# Altium PCB Core.PcbDoc
Units mm, origin at the board's own origin, x right, y up, seen from the top; angles counter-clockwise.
Board outline 280.42 x 192.91 mm, 2 copper layers (Top Layer, Bottom Layer); 1 components, 3 nets, 82 pads, 0 vias.
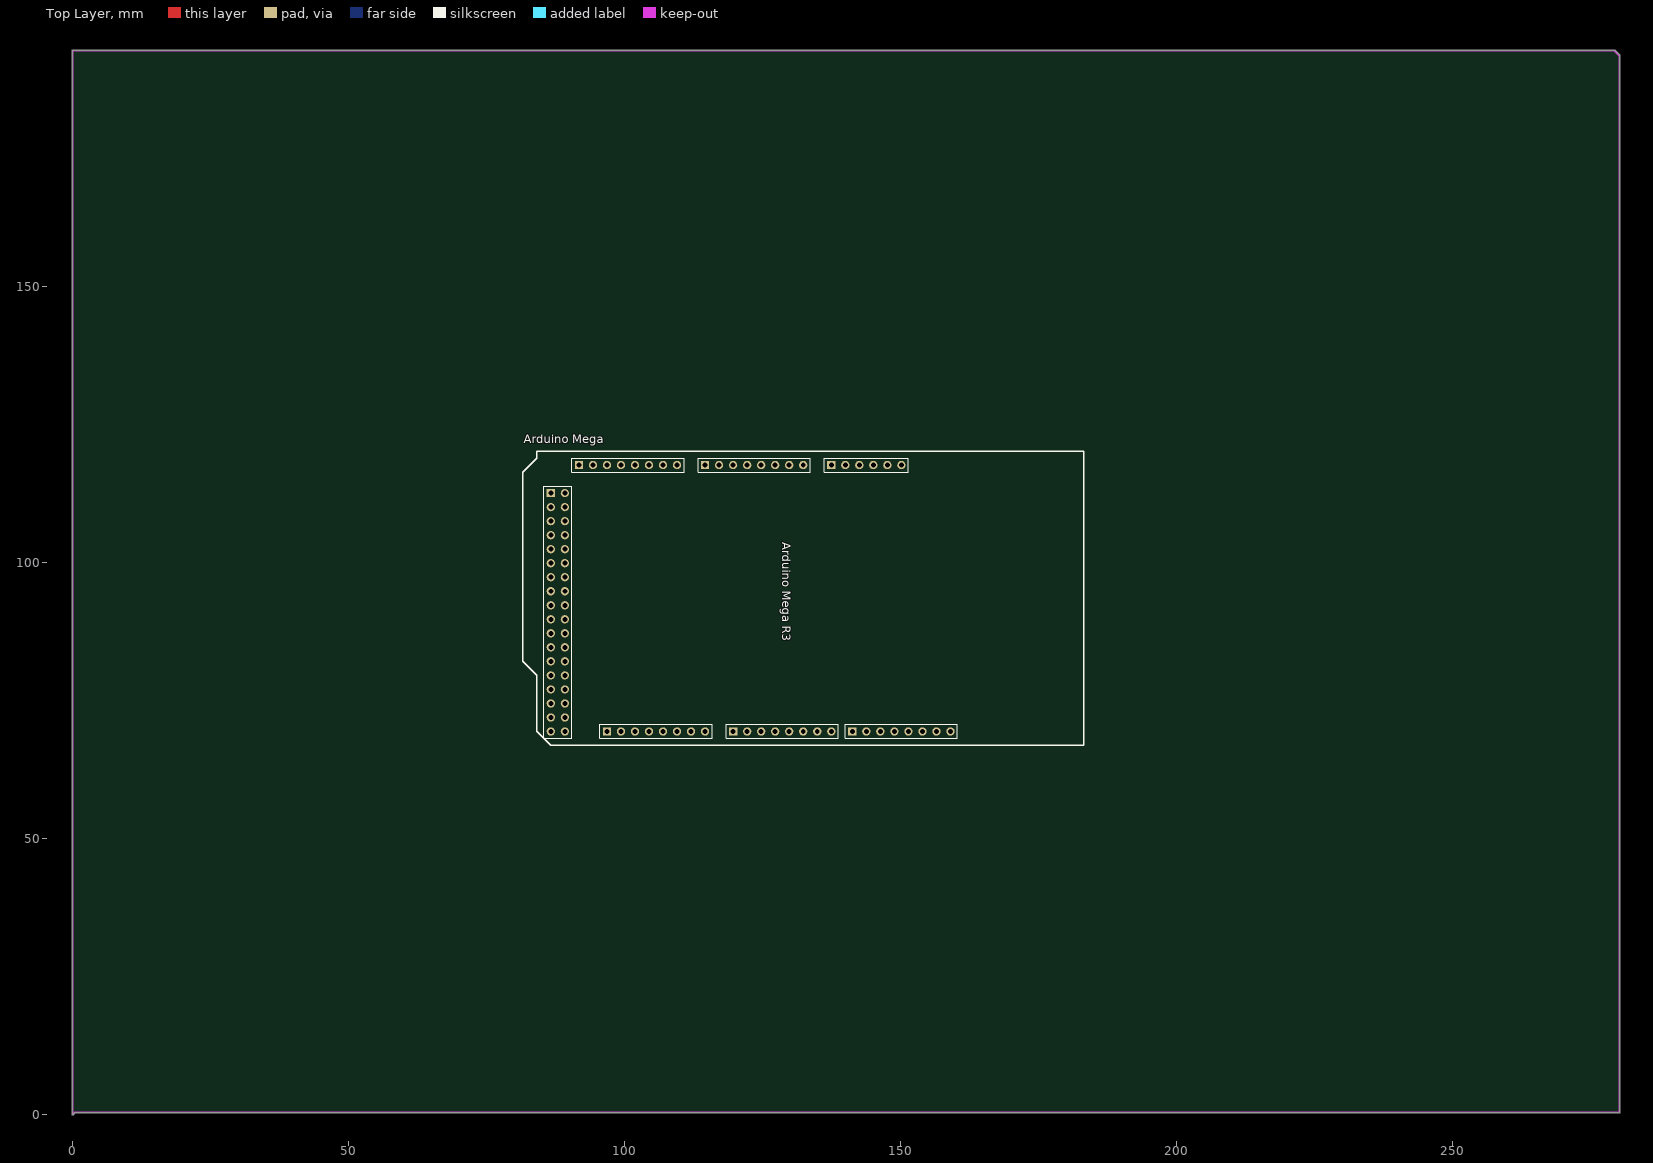
[diagram p0: Top Layer view]
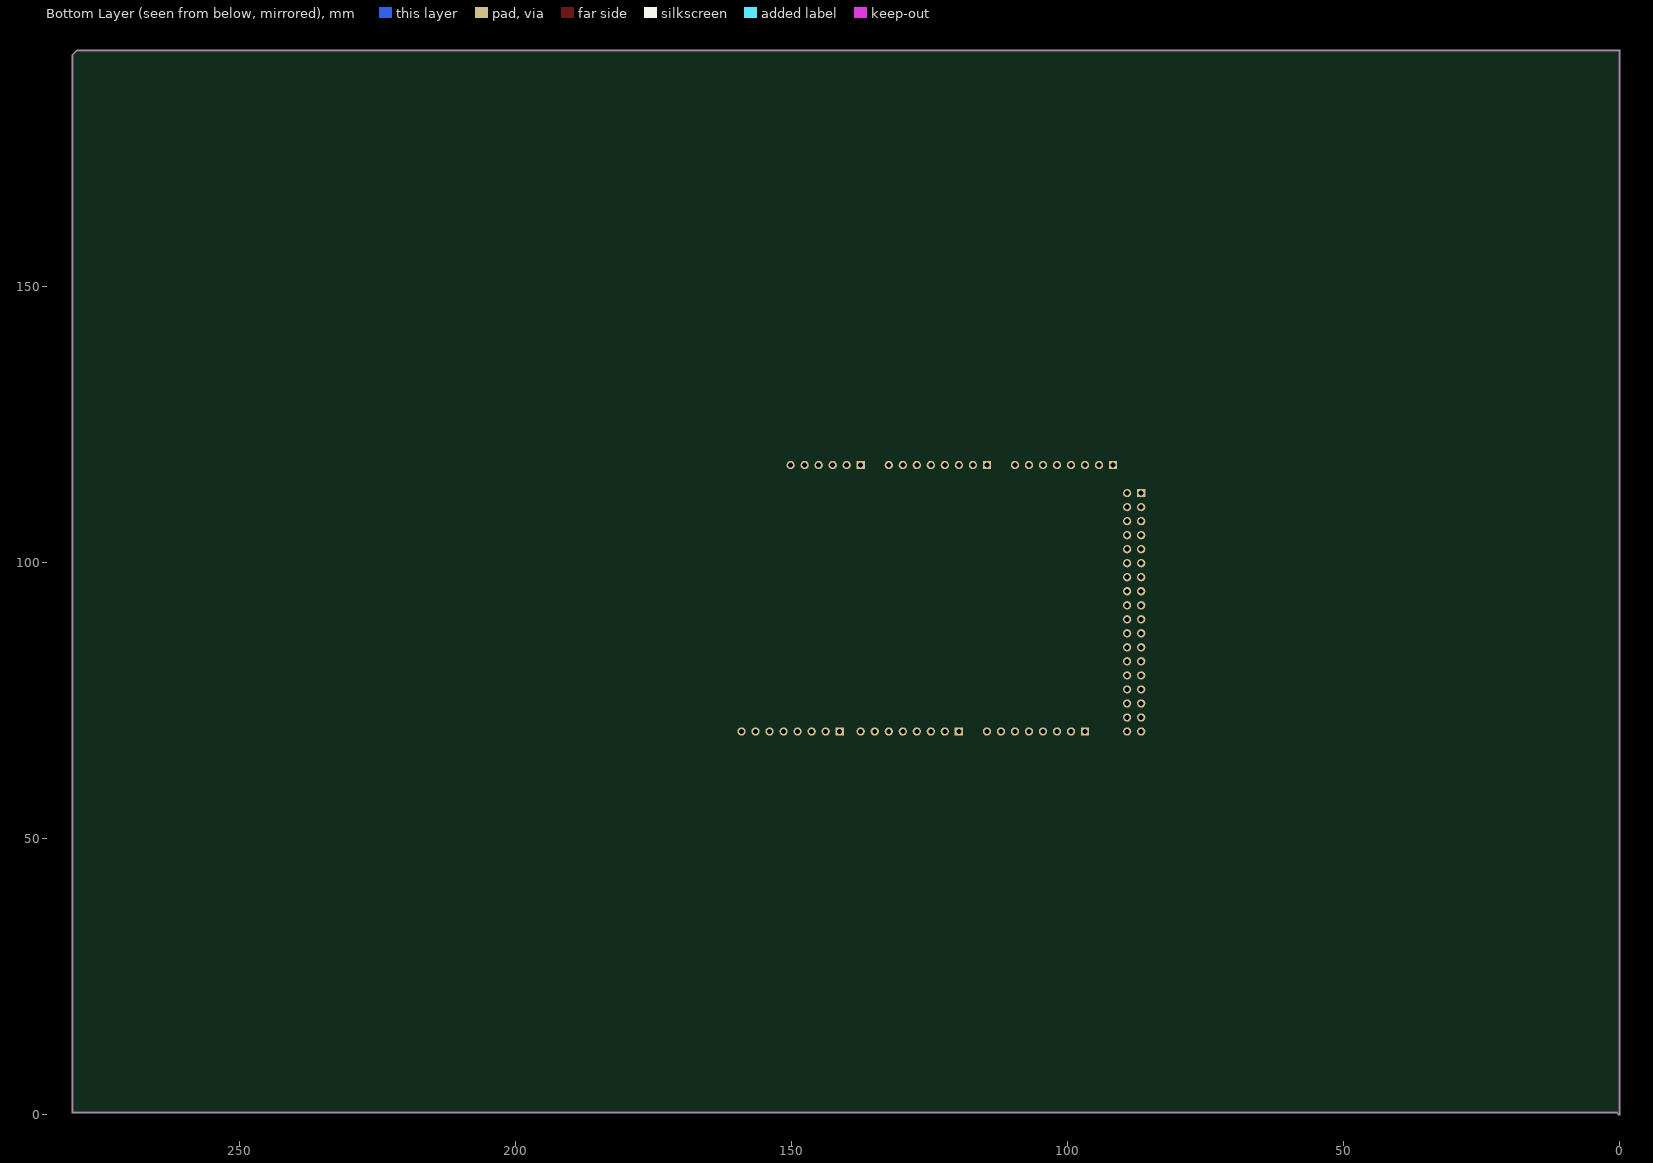
[diagram p1: Bottom Layer view, seen from below]

## Layer stack, top to bottom
Top Solder: solder mask 0.0102, Solder Resist, Dk 3.5
Top Layer: signal copper 0.0356
Dielectric 1: dielectric 0.32, FR-4, Dk 4.8
Bottom Layer: signal copper 0.0356
Bottom Solder: solder mask 0.0102, Solder Resist, Dk 3.5

## Board outline
-0.127,0 -0.127,192.532 cw(c0,192.532) -0.11,192.595 cw(c0,192.659) 0,192.786 279.273,192.786 cw(c279.273,192.659) 279.364,192.749 279.363,192.749 280.252,191.86 280.252,191.861 cw(c280.162,191.77) 280.289,191.77 280.289,0.381 cw(c280.162,0.381) 280.162,0.254 0.434,0.254 0.09,-0.09 0.091,-0.09 cw(c0,0)

## Design rules (kind name [scope] priority, off if disabled: settings)
Clearance [All] p1: gap=0.254 ignorepadtopadclearanceinfootprint=FALSE except(0: Arc-Hole Track-Hole SMDPad-Hole THPad-Hole Via-Hole Fill-Hole Poly-Hole Region-Hole Text-Hole)
PolygonConnect [All] p1: connectstyle=Relief reliefconductorwidth=0.254 reliefentries=4 polygonreliefangle="90 Angle" airgapwidth=0.254
RoutingVias [All] p1: holewidth=0.711 width=1.27 viastyle="Through Hole" minholewidth=0.711 minwidth=1.27 maxholewidth=0.711 maxwidth=1.27
SolderMaskExpansion [All] p1: expansion=0.102
Width [All] p1: maxlimit=0.254 minlimit=0.254 preferedwidth=0.254
30 further rules are at their usual default settings.

## Components (designator, comment, footprint, x,y, rotation, side; value= is the part's Value field where it differs from the comment)
"Arduino Mega" "ARDUINO MEGA" "ARDUINO MEGA" 129.794,92.202 r180 top

## Footprints (in the part's own frame and the unit in brackets; to place one, negate y for a bottom-side part, rotate by r counter-clockwise, add the part's x,y. Pads: shape width x height; smd on the part's side, far side on the other; paste and mask are expansions set on the pad)
"ARDUINO MEGA" [mm] "Arduino Mega 2560"
  rect 1.5x1.5 hole 0.9: 0(10.16,22.86) 8(-11.43,22.86) 21(33.02,22.86) 59(-7.62,-25.4) 67(15.24,-25.4) 75(38.1,-25.4) 79(43.18,-20.32)
  round 1.5 hole 0.9: 1(7.62,22.86) 2(5.08,22.86) 3(2.54,22.86) 4(0,22.86) 5(-2.54,22.86) 6(-5.08,22.86) 7(-7.62,22.86) 9(-13.97,22.86) 10(-16.51,22.86) 11(-19.05,22.86) 12(-21.59,22.86) 13(-24.13,22.86) 14(15.24,22.86) 15(17.78,22.86) 16(20.32,22.86) 17(22.86,22.86) 18(25.4,22.86) 19(27.94,22.86) 20(30.48,22.86) 22(40.64,20.32) 23(43.18,20.32) 24(40.64,17.78) 25(43.18,17.78) 26(40.64,15.24) 27(43.18,15.24) 28(40.64,12.7) 29(43.18,12.7) 30(40.64,10.16) 31(43.18,10.16) 32(40.64,7.62) 33(43.18,7.62) 34(40.64,5.08) 35(43.18,5.08) 36(40.64,2.54) 37(43.18,2.54) 38(40.64,0) 39(43.18,0) 40(40.64,-2.54) 41(43.18,-2.54) 42(40.64,-5.08) 43(43.18,-5.08) 44(40.64,-7.62) 45(43.18,-7.62) 46(40.64,-10.16) 47(43.18,-10.16) 48(40.64,-12.7) 49(43.18,-12.7) 50(40.64,-15.24) 51(43.18,-15.24) 52(40.64,-17.78) 53(43.18,-17.78) 54(-20.32,-25.4) 55(-17.78,-25.4) 56(-15.24,-25.4) 57(-12.7,-25.4) 58(-10.16,-25.4) 60(-2.54,-25.4) 61(0,-25.4) 62(2.54,-25.4) 63(5.08,-25.4) 64(7.62,-25.4) 65(10.16,-25.4) 66(12.7,-25.4) 68(20.32,-25.4) 69(22.86,-25.4) 70(25.4,-25.4) 71(27.94,-25.4) 72(30.48,-25.4) 73(33.02,-25.4) 74(35.56,-25.4) 76(-26.67,22.86) 77(-29.21,22.86) 78(40.64,-20.32) 80(43.18,22.86) 81(40.64,22.86)
  silkscreen extent -53.34,-27.94 48.26,25.4

## Nets (pads, with @x,y where several pads share a name; then routed paths per layer and width w, separated by ;. In a path a pad name is that pad's centre, name@x,y a point inside that pad or via, vN(x,y) a via of type N, cw(c..) or ccw(c..) an arc to the next point about the centre after c; other vN are vias at no path point)
3.3V: 
DHT_Signal: "Arduino Mega.53"
GND: 
pads on no net: "Arduino Mega.0" "Arduino Mega.1" "Arduino Mega.2" "Arduino Mega.3" "Arduino Mega.4" "Arduino Mega.5" "Arduino Mega.6" "Arduino Mega.7" "Arduino Mega.8" "Arduino Mega.9" "Arduino Mega.10" "Arduino Mega.11" "Arduino Mega.12" "Arduino Mega.13" "Arduino Mega.14" "Arduino Mega.15" "Arduino Mega.16" "Arduino Mega.17" "Arduino Mega.18" "Arduino Mega.19" "Arduino Mega.20" "Arduino Mega.21" "Arduino Mega.22" "Arduino Mega.23" "Arduino Mega.24" "Arduino Mega.25" "Arduino Mega.26" "Arduino Mega.27" "Arduino Mega.28" "Arduino Mega.29" "Arduino Mega.30" "Arduino Mega.31" "Arduino Mega.32" "Arduino Mega.33" "Arduino Mega.34" "Arduino Mega.35" "Arduino Mega.36" "Arduino Mega.37" "Arduino Mega.38" "Arduino Mega.39" "Arduino Mega.40" "Arduino Mega.41" "Arduino Mega.42" "Arduino Mega.43" "Arduino Mega.44" "Arduino Mega.45" "Arduino Mega.46" "Arduino Mega.47" "Arduino Mega.48" "Arduino Mega.49" "Arduino Mega.50" "Arduino Mega.51" "Arduino Mega.52" "Arduino Mega.54" "Arduino Mega.55" "Arduino Mega.56" "Arduino Mega.57" "Arduino Mega.58" "Arduino Mega.59" "Arduino Mega.60" "Arduino Mega.61" "Arduino Mega.62" "Arduino Mega.63" "Arduino Mega.64" "Arduino Mega.65" "Arduino Mega.66" "Arduino Mega.67" "Arduino Mega.68" "Arduino Mega.69" "Arduino Mega.70" "Arduino Mega.71" "Arduino Mega.72" "Arduino Mega.73" "Arduino Mega.74" "Arduino Mega.75" "Arduino Mega.76" "Arduino Mega.77" "Arduino Mega.78" "Arduino Mega.79" "Arduino Mega.80" "Arduino Mega.81"

## Keep-outs
Top Layer:
  lines w0.254: 0,0 0.381,0.381 ; 279.273,192.659 280.162,191.77
Keep-Out Layer:
  lines w0.254: 0,0 0,192.532 ; 0,192.659 279.273,192.659 ; 0.381,0.381 280.162,0.381 280.162,191.77

## Text inside footprints (layer, text, board x,y; h text height)
"Arduino Mega": Top Overlay "Arduino Mega R3" at 128.524,103.632 h1.52 r270